# EAGLE board CT_schematic (EAGLE 7.6.0)

Size 100 x 80 mm. Coordinates in mm from the lower left corner, seen from the top.
Outline: 0,0 100,0 100,80 0,80 0,0
Copper layers (1*16): Top 0.035mm / dielectric 1.5mm / Bottom 0.035mm
Design rules "default": minimum track width 10mil, minimum drill 24mil, track to track 8mil, track to pad 8mil, pad to pad 8mil, via to via 8mil, smd to smd 8mil, copper to edge 40mil, drill to drill 8mil, minimum pad ring 10mil, minimum via ring 8mil, stop-mask expansion 4mil, vias tented up to drill 0mil, thermal gap 10mil

## Footprints (pad centres in the part's own frame; a part is rotated, then mirrored left to right if it is on the bottom)
C0603 = smd 0.8 x 0.8: 1 -0.762,0; 2 0.762,0
C0402 = smd 0.5 x 0.5: 1 -0.508,0; 2 0.508,0
C1206 = smd 1.3 x 1.6: 1 -1.524,0; 2 1.524,0
C1210 = smd 1.2 x 2.5: 1 -1.524,0; 2 1.524,0
EXV-9H = smd 3.505 x 1.676: 1 -2.857,0; 2 2.857,0
L0603 = smd 0.8 x 0.8: 1 -0.762,0; 2 0.762,0
PJ-037B_PACKAGE = drill 3.7 square: 1 12,0 | drill 3.2 square: 2 6,0
R0603 = smd 0.8 x 0.8: 1 -0.762,0; 2 0.762,0
UFBGA100 = smd 0.28 x 0.28: A1 -2.75,2.75; A2 -2.25,2.75; A3 -1.75,2.75; A4 -1.25,2.75; A5 -0.75,2.75; A6 -0.25,2.75; A7 0.25,2.75; A8 0.75,2.75; A9 1.25,2.75; A10 1.75,2.75; A11 2.25,2.75; A12 2.75,2.75; B1 -2.75,2.25; B2 -2.25,2.25; B3 -1.75,2.25; B4 -1.25,2.25; B5 -0.75,2.25; B6 -0.25,2.25; B7 0.25,2.25; B8 0.75,2.25; B9 1.25,2.25; B10 1.75,2.25; B11 2.25,2.25; B12 2.75,2.25; C1 -2.75,1.75; C2 -2.25,1.75; C3 -1.75,1.75; C4 -1.25,1.75; C5 -0.75,1.75; C8 0.75,1.75; C9 1.25,1.75; C10 1.75,1.75; C11 2.25,1.75; C12 2.75,1.75; D1 -2.75,1.25; D2 -2.25,1.25; D3 -1.75,1.25; D10 1.75,1.25; D11 2.25,1.25; D12 2.75,1.25; E1 -2.75,0.75; E2 -2.25,0.75; E3 -1.75,0.75; E10 1.75,0.75; E11 2.25,0.75; E12 2.75,0.75; F1 -2.75,0.25; F2 -2.25,0.25; F11 2.25,0.25; F12 2.75,0.25; G1 -2.75,-0.25; G2 -2.25,-0.25; G11 2.25,-0.25; G12 2.75,-0.25; H1 -2.75,-0.75; H2 -2.25,-0.75; H3 -1.75,-0.75; H10 1.75,-0.75; H11 2.25,-0.75; H12 2.75,-0.75; J1 -2.75,-1.25; J2 -2.25,-1.25; J3 -1.75,-1.25; J10 1.75,-1.25; J11 2.25,-1.25; J12 2.75,-1.25; K1 -2.75,-1.75; K2 -2.25,-1.75; K3 -1.75,-1.75; K4 -1.25,-1.75; K5 -0.75,-1.75; K8 0.75,-1.75; K9 1.25,-1.75; K10 1.75,-1.75; K11 2.25,-1.75; K12 2.75,-1.75; L1 -2.75,-2.25; L2 -2.25,-2.25; L3 -1.75,-2.25; L4 -1.25,-2.25; L5 -0.75,-2.25; L6 -0.25,-2.25; L7 0.25,-2.25; L8 0.75,-2.25; L9 1.25,-2.25; L10 1.75,-2.25; L11 2.25,-2.25; L12 2.75,-2.25; M1 -2.75,-2.75; M2 -2.25,-2.75; M3 -1.75,-2.75; M4 -1.25,-2.75; M5 -0.75,-2.75; M6 -0.25,-2.75; M7 0.25,-2.75; M8 0.75,-2.75; M9 1.25,-2.75; M10 1.75,-2.75; M11 2.25,-2.75; M12 2.75,-2.75
TST-110-05-T-D-RA = drill 1 pad 1.7 square: 1 0,0 | drill 1 pad 1.7: 2 0,2.54; 3 2.54,0; 4 2.54,2.54; 5 5.08,0; 6 5.08,2.54; 7 7.62,0; 8 7.62,2.54; 9 10.16,0; 10 10.16,2.54; 11 12.7,0; 12 12.7,2.54; 13 15.24,0; 14 15.24,2.54; 15 17.78,0; 16 17.78,2.54; 17 20.32,0; 18 20.32,2.54; 19 22.86,0; 20 22.86,2.54
DFN8-S = smd 0.6 x 0.4: 1 -2.69,1.905; 2 -2.69,0.635; 3 -2.69,-0.635; 4 -2.69,-1.905; 5 2.69,-1.905; 6 2.69,-0.635; 7 2.69,0.635; 8 2.69,1.905
SOIC-8 = smd 1.6 x 0.6: 1 -2.7,1.905 | smd 1.55 x 0.6: 2 -2.7,0.635; 3 -2.7,-0.635; 4 -2.7,-1.905; 5 2.7,-1.905; 6 2.7,-0.635; 7 2.7,0.635; 8 2.7,1.905
182-009-MALE = drill 1.194 pad 1.524 octagon: 1 -5.537,10.923; 2 -2.769,10.923; 3 0,10.923; 4 2.769,10.923; 5 5.537,10.923; 6 -4.153,8.08; 7 -1.384,8.08; 8 1.384,8.08; 9 4.153,8.08 | hole 3.048: -12.446,9.501; 12.446,9.501
ABLS-25.000MHZ-B2F-T = smd 5.6 x 2.8: 1 -3.81,0; 2 5.69,0
ASEK = smd 1.4 x 1: 1 -1.1,-0.8; 2 1.1,-0.8; 3 1.1,0.8; 4 -1.1,0.8
WSON-8 = smd 0.3 x 0.6: 1 -0.75,0; 2 0.05,0; 3 0.85,0; 4 1.65,0; 5 1.65,3.8; 6 0.85,3.8; 7 0.05,3.8; 8 -0.75,3.8 | smd 3 x 2.6: PAD 0.45,1.9
SON-6 = smd 0.55 x 0.3: 1 -0.355,0.5 | smd 0.52 x 0.3: 2 -0.37,0; 3 -0.37,-0.5; 4 0.37,-0.5; 5 0.37,0; 6 0.37,0.5
SW_4-1437565-2 = smd 1.4 x 2.1: 1 -2.23,4.55; 2 -2.23,-4.55; 3 2.23,4.55; 4 2.23,-4.55
LGM67K-G1J2-24-Z = smd 0.8 x 1.4: A -2,0; C 0,0
NC7SZ125M5X = smd 1.3 x 0.7: 1 -1.3,0.95; 2 -1.3,0; 3 -1.3,-0.95; 4 1.3,-0.95; 5 1.3,0.95
DUMMY_PACKAGE_149 = drill 0.3: 1 0,-1; 2 1.5,-1

## Placement (x,y rotation side)
C1  1e-06  [C0603]  -48.26,67.31 0 top  (outside the outline)
C2  1e-07  [C0603]  -52.07,67.31 0 top  (outside the outline)
C3  1e-07  [C0603]  -55.88,67.31 0 top  (outside the outline)
C4  1e-07  [C0603]  -59.69,67.31 0 top  (outside the outline)
C5  1e-07  [C0603]  -63.5,67.31 0 top  (outside the outline)
C6  1e-07  [C0603]  -67.31,67.31 0 top  (outside the outline)
C7  1e-07  [C0603]  -71.12,67.31 0 top  (outside the outline)
C8  4.7e-06  [C0603]  -44.45,67.31 0 top  (outside the outline)
C9  1e-07  [C0603]  -15.24,72.39 0 top  (outside the outline)
C10  1e-08  [C0603]  -19.05,72.39 0 top  (outside the outline)
C11  1e-06  [C0603]  -22.86,72.39 0 top  (outside the outline)
C12  1e-11  [C0402]  -72.39,72.39 0 top  (outside the outline)
C13  1e-11  [C0402]  -15.24,77.47 0 top  (outside the outline)
C14  1e-07  [C0402]  -19.05,77.47 0 top  (outside the outline)
C15  1e-08  [C0402]  -22.86,77.47 0 top  (outside the outline)
C16  1e-06  [C0603]  -26.67,72.39 0 top  (outside the outline)
C17  1e-06  [C0603]  -30.48,72.39 0 top  (outside the outline)
C18  1e-08  [C0402]  -26.67,77.47 0 top  (outside the outline)
C19  1e-08  [C0402]  -30.48,77.47 0 top  (outside the outline)
C20  1e-05  [C1206]  -22.86,60.96 0 top  (outside the outline)
C21  1e-05  [C1210]  -71.12,54.61 0 top  (outside the outline)
C22  1e-06  [C0603]  -34.29,72.39 0 top  (outside the outline)
C23  1e-05  [C1210]  -16.51,62.23 0 top  (outside the outline)
C24  1e-07  [C0402]  -34.29,77.47 0 top  (outside the outline)
C25  0.0001  [EXV-9H]  -17.78,54.61 0 top  (outside the outline)
C26  0.0001  [EXV-9H]  -29.21,54.61 0 top  (outside the outline)
C27  1e-08  [C0402]  -38.1,77.47 0 top  (outside the outline)
C28  1e-08  [C0402]  -41.91,77.47 0 top  (outside the outline)
F1  240.0  [L0603]  -38.1,72.39 0 top  (outside the outline)
J1  PJ-037B  [PJ-037B_PACKAGE]  -67.31,7.62 0 top  (outside the outline)
R2  1000.0  [R0603]  -41.91,72.39 0 top  (outside the outline)
R4  4700.0  [R0603]  -45.72,72.39 0 top  (outside the outline)
R5  2200.0  [R0603]  -49.53,72.39 0 top  (outside the outline)
R6  2200.0  [R0603]  -53.34,72.39 0 top  (outside the outline)
R7  10000.0  [R0603]  -71.12,60.96 0 top  (outside the outline)
R8  10000.0  [R0603]  -15.24,67.31 0 top  (outside the outline)
R9  10000.0  [R0603]  -20.32,67.31 0 top  (outside the outline)
R10  10000.0  [R0603]  -25.4,67.31 0 top  (outside the outline)
R11  10000.0  [R0603]  -30.48,67.31 0 top  (outside the outline)
R12  120.0  [R0603]  -57.15,72.39 0 top  (outside the outline)
R13  100000.0  [R0603]  -40.64,60.96 0 top  (outside the outline)
R14  2231.0  [R0603]  -60.96,72.39 0 top  (outside the outline)
R15  1000.0  [R0603]  -64.77,72.39 0 top  (outside the outline)
R16  100000.0  [R0603]  -45.72,60.96 0 top  (outside the outline)
R17  300000.0  [R0603]  -50.8,60.96 0 top  (outside the outline)
R18  100000.0  [R0603]  -55.88,60.96 0 top  (outside the outline)
R19  10000.0  [R0603]  -35.56,67.31 0 top  (outside the outline)
R20  10000.0  [R0603]  -40.64,67.31 0 top  (outside the outline)
R21  9100.0  [R0603]  -68.58,72.39 0 top  (outside the outline)
R22  680000.0  [R0603]  -60.96,60.96 0 top  (outside the outline)
R23  120000.0  [R0603]  -66.04,60.96 0 top  (outside the outline)
U1  STM32F373VCH7  [UFBGA100]  -44.45,27.94 0 top  (outside the outline)
U2  TST-110-05-T-D-RA  [TST-110-05-T-D-RA]  -46.99,44.45 0 top  (outside the outline)
U3  24AA512-I/MF  [DFN8-S]  -58.42,27.94 0 top  (outside the outline)
U4  MCP2562-E/SN  [SOIC-8]  -71.12,27.94 0 top  (outside the outline)
U5  182-009-113R531  [182-009-MALE]  -36.83,6.35 0 top  (outside the outline)
U6  ABLS-25.000MHZ-B2F-T  [ABLS-25.000MHZ-B2F-T]  -48.26,54.61 0 top  (outside the outline)
U7  ASEK-32.768KHz-ECST  [ASEK]  -66.04,46.99 0 top  (outside the outline)
U8  LP3878SDX-ADJ/NOPB  [WSON-8]  -30.48,36.83 0 top  (outside the outline)
U9  LP2951ACSDX/NOPB  [WSON-8]  -48.26,36.83 0 top  (outside the outline)
U10  TPS3895ADRYR  [SON-6]  -49.53,76.2 0 top  (outside the outline)
U11  4-1437565-2  [SW_4-1437565-2]  -27.94,27.94 0 top  (outside the outline)
U12  Q65110A2395  [LGM67K-G1J2-24-Z]  -59.69,54.61 0 top  (outside the outline)
U13  nc7sz125m5x  [NC7SZ125M5X]  -27.94,60.96 0 top  (outside the outline)
U14  nc7sz125m5x  [NC7SZ125M5X]  -34.29,60.96 0 top  (outside the outline)
U15  Dummy  [DUMMY_PACKAGE_149]  -46.99,77.47 0 top  (outside the outline)

## Library data of the parts
C1-C28 F1 J1 R2 R4-R23 U1-U15 = circuit_tree

## Nets
CLK_CRYSTAL_U1_F1: C12.1 U1.F1 U6.1
CLK_CRYSTAL_U1_G1: C13.1 U1.G1 U6.2
CLK_U1_D1: U1.D1 U7.3
GND: C1.2 C2.2 C3.2 C4.2 C5.2 C6.2 C7.2 C8.2 C9.2 C10.2 C11.2 C12.2 C13.2 C14.2 C15.2 C16.2 C17.2 C18.2 C19.2 C20.2 C21.2 C22.2 C23.2 C24.2 C25.2 C26.2 C27.2 C28.2 J1.2 R2.2 R7.2 R9.2 R10.2 R15.2 R18.2 R21.2 R23.2 U1.D3 U1.F11 U1.K1 U2.4 U2.6 U2.8 U2.10 U2.12 U2.14 U2.16 U2.18 U2.20 U3.4 U3.7 U4.2 U4.8 U5.5 U7.2 U8.3 U8.PAD U9.3 U9.4 U9.PAD U10.2 U12.C U13.2 U13.3 U14.1 U14.3 U15.1
NET_U1_A3: R5.1 U1.A3 U3.6
NET_U1_A4: R7.1 U1.A4
NET_U1_B3: R6.1 U1.B3 U3.5
NET_U1_F12: C9.1 U1.F12 U1.L11
NET_U1_G12: U1.G12
NET_U1_H2: R4.1 U1.H2 U14.4
NET_U1_K12: U1.K12
NET_U1_M1: C10.1 C11.1 F1.1 U1.G12 U1.L1 U1.L12 U1.M1
NET_U1_M11: U12.A
NET_U1_M12: U11.3 U11.4
NET_U3_1: R9.1 U3.1
NET_U3_2: R10.1 U3.2
NET_U3_3: R11.1 U3.3
NET_U4_6: R12.2 U4.6
NET_U5_2: R12.2 U4.6 U5.2
NET_U5_3: R12.1 U4.7 U5.3
NET_U8_1: C19.1 U8.1
NET_U8_6: R14.2 R15.1 U8.6
NET_U8_8: R13.1 U8.8
NET_U9_5: R16.1 U9.5
NET_U9_7: R17.2 R18.1 U9.7
NET_U10_1: R20.1 R21.1 U10.1
NET_U10_3: R22.2 R23.1 U10.3
NET_U10_4: R19.1 U10.4 U13.4 U14.2
NET_U11_1: R2.1 U11.1 U11.2
PROC_CAN_RX: U1.B12 U4.4
PROC_CAN_TX: U1.A12 U4.1
PROC_DAC1_OUT2: U1.K4 U15.2
PROC_SYS_JTCK_SWCLK: U1.A10 U2.9
PROC_SYS_JTDO_TRACESWO: U1.A8 U2.13
PROC_SYS_JTMS_SWDIO: U1.A11 U2.7
RST_OUT_U2_SRESET_B: R8.1 U2.15 U13.1
VCC_S1_10V6: C20.1 C22.1 C25.1 C26.1 J1.1 R13.2 U8.4 U9.8
VCC_TIER1_3V3: C1.1 C2.1 C3.1 C4.1 C5.1 C6.1 C7.1 C8.1 C14.1 C15.1 C17.1 C18.1 C21.1 C24.1 C27.1 C28.1 F1.2 R4.2 R5.2 R6.2 R8.2 R11.2 R14.1 R19.2 R20.2 R22.1 U1.C4 U1.E2 U1.G11 U1.H3 U2.1 U3.8 U4.5 U7.4 U8.5 U10.6 U13.5 U14.5
VCC_TIER1_5V0: C16.1 C23.1 R16.2 R17.1 U4.3 U9.1

## Tracks (layer width: path | path; a pad name or v marks a point on that pad's centre or on a via)
CLK_CRYSTAL_U1_F1  (2 unrouted)
CLK_CRYSTAL_U1_G1  (2 unrouted)
CLK_U1_D1  (1 unrouted)
GND  (66 unrouted)
NET_U1_A3  (2 unrouted)
NET_U1_A4  (1 unrouted)
NET_U1_B3  (2 unrouted)
NET_U1_F12  (2 unrouted)
NET_U1_H2  (2 unrouted)
NET_U1_M1  (6 unrouted)
NET_U1_M12  (1 unrouted)
NET_U3_1  (1 unrouted)
NET_U3_2  (1 unrouted)
NET_U3_3  (1 unrouted)
NET_U4_6  (1 unrouted)
NET_U5_2  (2 unrouted)
NET_U5_3  (2 unrouted)
NET_U8_1  (1 unrouted)
NET_U8_6  (2 unrouted)
NET_U8_8  (1 unrouted)
NET_U9_5  (1 unrouted)
NET_U9_7  (2 unrouted)
NET_U10_1  (2 unrouted)
NET_U10_3  (2 unrouted)
NET_U10_4  (3 unrouted)
NET_U11_1  (2 unrouted)
PROC_CAN_RX  (1 unrouted)
PROC_CAN_TX  (1 unrouted)
PROC_DAC1_OUT2  (1 unrouted)
PROC_SYS_JTCK_SWCLK  (1 unrouted)
PROC_SYS_JTDO_TRACESWO  (1 unrouted)
PROC_SYS_JTMS_SWDIO  (1 unrouted)
RST_OUT_U2_SRESET_B  (2 unrouted)
VCC_S1_10V6  (7 unrouted)
VCC_TIER1_3V3  (37 unrouted)
VCC_TIER1_5V0  (5 unrouted)